# EAGLE board haasoscope_pro_input_board (EAGLE 9.6.2)
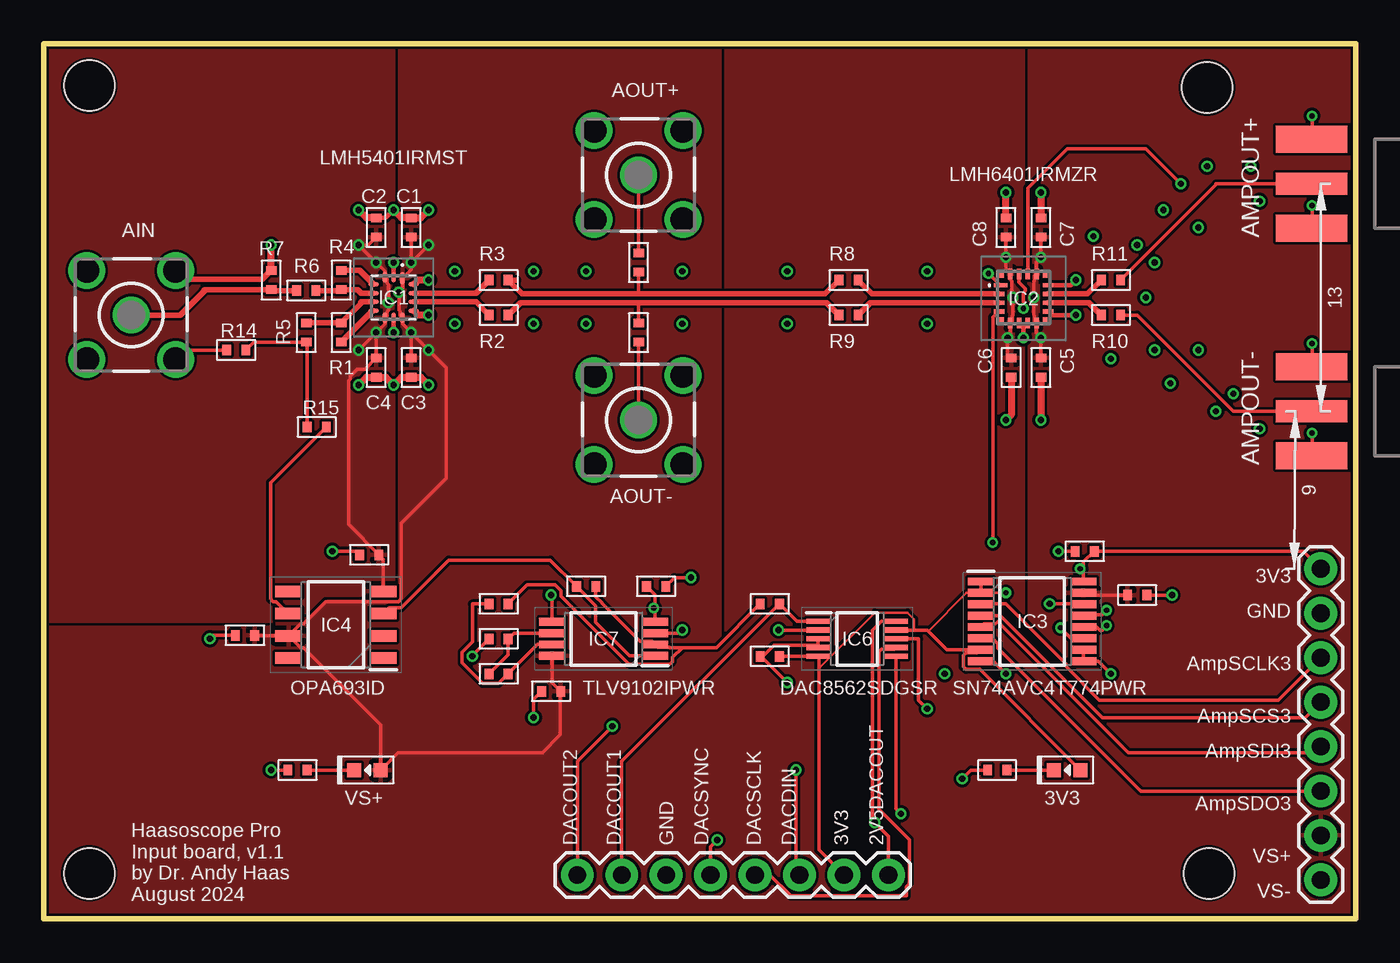
[diagram p0: board, top side]
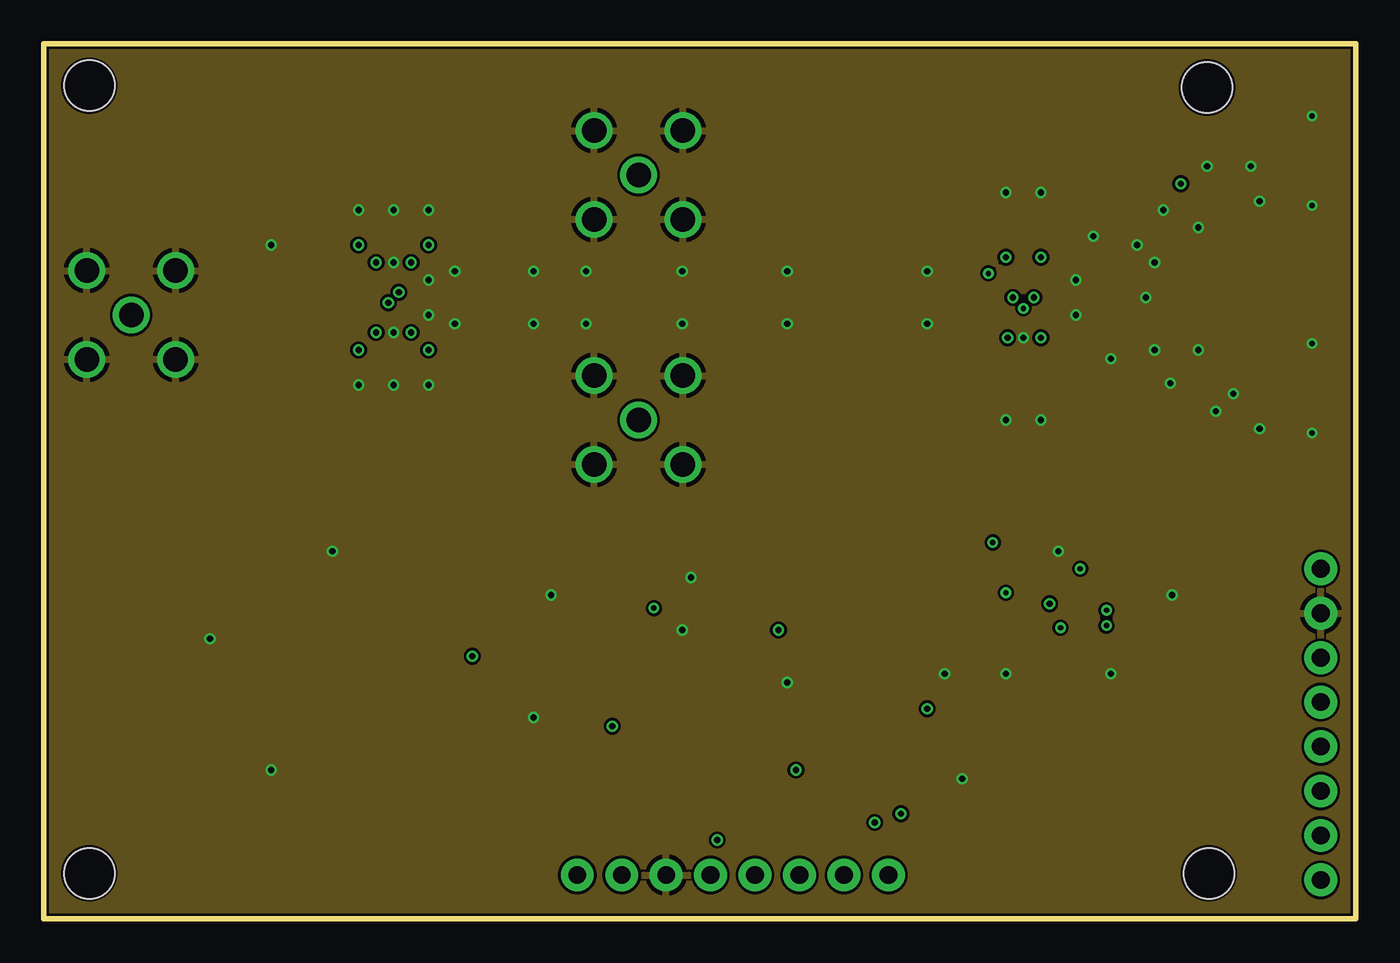
[diagram p1: board, inner layer topgnd]
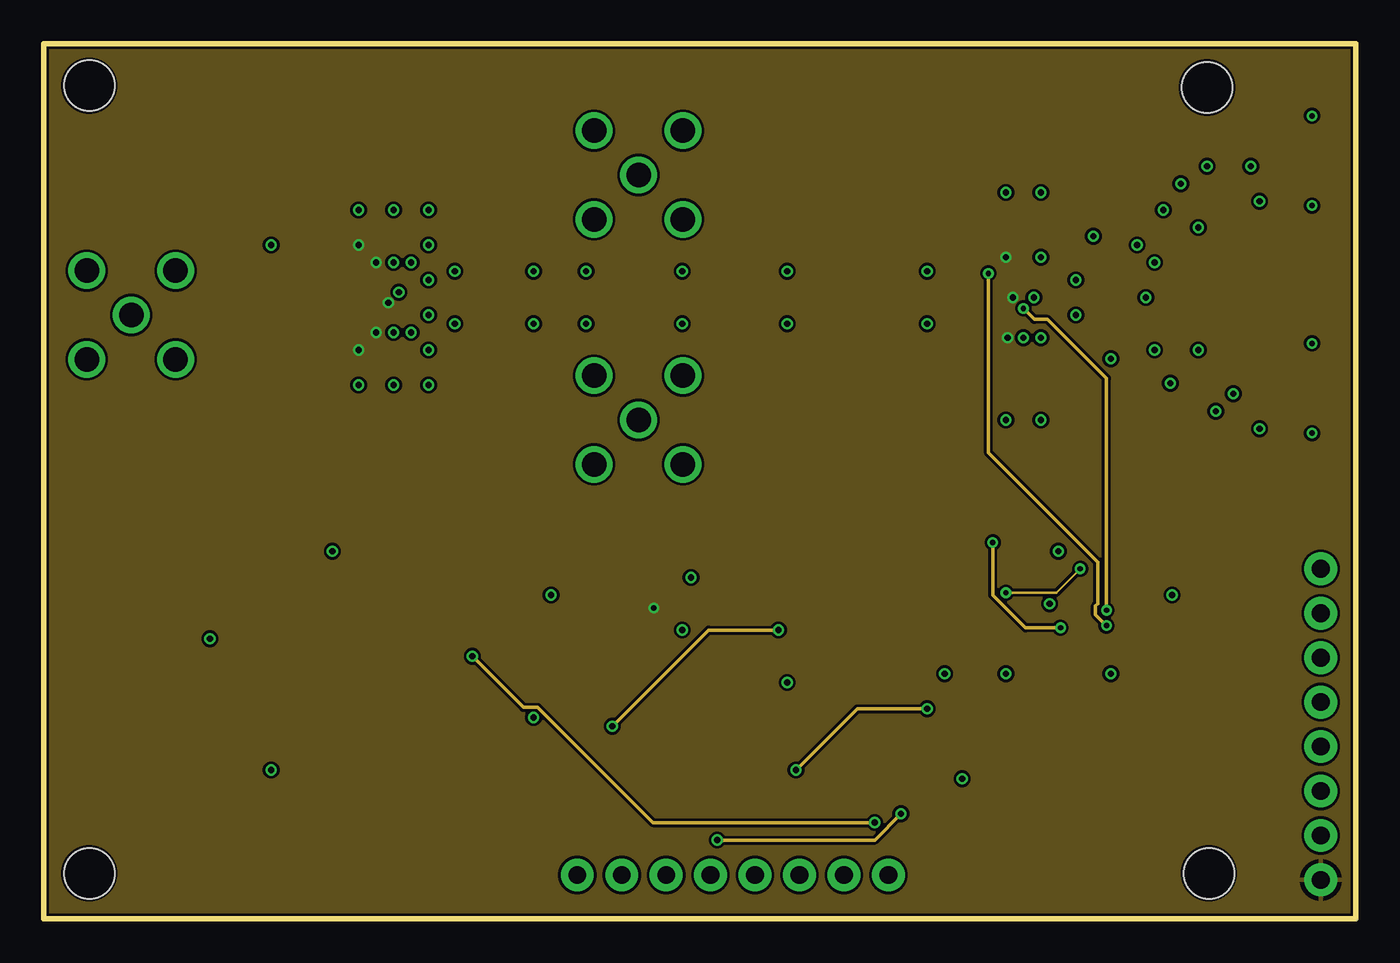
[diagram p2: board, inner layer vsmin]
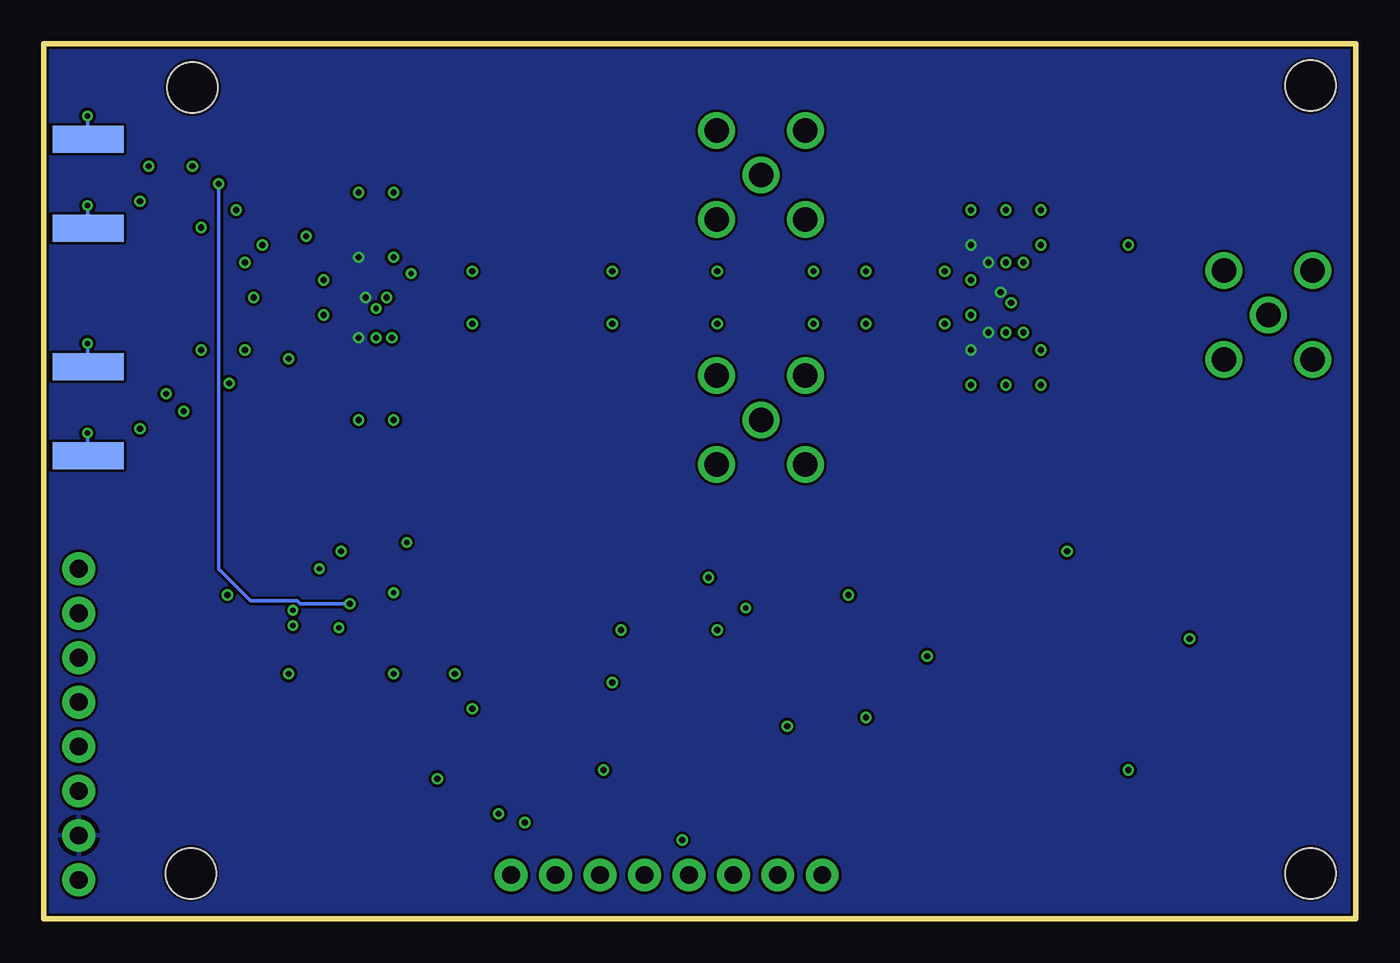
[diagram p3: board, bottom side, seen from below]

Size 75 x 50 mm. Coordinates in mm from the lower left corner, seen from the top.
Outline: 0,50 0,0 75,0 75,50 0,50
Copper layers (1*2*15*16): top 0.035mm / dielectric 0.2mm / topgnd 0.0175mm / dielectric 0.3mm / vsmin 0.0175mm / dielectric 0.2mm / vsplus 0.035mm
Design rules "Seeed_AllPCB_MacroFab_haas6mil *": minimum track width 6mil, minimum drill 12mil, track to track 6mil, track to pad 6mil, pad to pad 6mil, via to via 6mil, smd to smd 0mil, copper to edge 6mil, drill to drill 6mil, minimum pad ring 6mil, minimum via ring 6mil, stop-mask expansion 6mil, vias tented up to drill 25mil, thermal gap 10mil
Net classes: 0 default: width 0.203 mm; 1 power: width 0.152 mm
Holes 2.9 mm at 2.6,47.6 66.5,47.5 2.6,2.6 66.6,2.6

## Footprints (pad centres in the part's own frame; a part is rotated, then mirrored left to right if it is on the bottom)
BU-SMB-V = drill 1.4: 1 0,0; 2 -2.54,2.54; 3 2.54,2.54; 4 2.54,-2.54; 5 -2.54,-2.54
SMA_EDGELAUNCH = smd 4.064 x 1.524: GND@1 2.032,-2.54; GND@2 2.032,2.54 | smd 4.064 x 1.524 bottom: GND@3 2.032,2.54; GND@4 2.032,-2.54 | smd 4.064 x 1.27: P 2.032,0
C0402 = smd 0.5 x 0.6: P$1 -0.55,0; P$2 0.55,0
LED0603 = smd 0.8 x 0.8: ANODE 0.75,0; CATHODE -0.75,0
LMH5401IRMSR = smd 0.7 x 0.25: 1 -1.1,0.5 | smd 0.6 x 0.25: 2 -1.15,0; 3 -1.15,-0.5; 8 1.15,-0.5; 9 1.15,0; 10 1.15,0.5 | smd 0.25 x 0.6: 4 -0.75,-1.15; 5 -0.25,-1.15; 6 0.25,-1.15; 7 0.75,-1.15; 11 0.75,1.15; 12 0.25,1.15; 13 -0.25,1.15; 14 -0.75,1.15
LMH6401IRMZR = smd 0.8 x 0.25: 1 -1.3,0.7 | smd 0.6 x 0.25: 2 -1.4,0.2; 3 -1.4,-0.3; 4 -1.4,-0.8; 9 1.4,-0.8; 10 1.4,-0.3; 11 1.4,0.2; 12 1.4,0.7 | smd 0.25 x 0.6: 5 -0.75,-1.45; 6 -0.25,-1.45; 7 0.25,-1.45; 8 0.75,-1.45; 13 0.75,1.35; 14 0.25,1.35; 15 -0.25,1.35; 16 -0.75,1.35 | smd 0.25 x 0.25: 17 -1.25,1.25; 18 -1.25,-1.25; 19 1.25,-1.25; 20 1.25,1.25
SOP65P640X120-16N = smd 1.475 x 0.45: 1 -2.938,2.275; 2 -2.938,1.625; 3 -2.938,0.975; 4 -2.938,0.325; 5 -2.938,-0.325; 6 -2.938,-0.975; 7 -2.938,-1.625; 8 -2.938,-2.275; 9 2.938,-2.275; 10 2.938,-1.625; 11 2.938,-0.975; 12 2.938,-0.325; 13 2.938,0.325; 14 2.938,0.975; 15 2.938,1.625; 16 2.938,2.275
SOIC127P600X175-8N = smd 1.528 x 0.65: 1 -2.711,1.905; 2 -2.711,0.635; 3 -2.711,-0.635; 4 -2.711,-1.905; 5 2.711,-1.905; 6 2.711,-0.635; 7 2.711,0.635; 8 2.711,1.905
SOP50P490X110-10N = smd 1.4 x 0.3: 1 -2.2,1; 2 -2.2,0.5; 3 -2.2,0; 4 -2.2,-0.5; 5 -2.2,-1; 6 2.2,-1; 7 2.2,-0.5; 8 2.2,0; 9 2.2,0.5; 10 2.2,1
SOP65P640X120-8N = smd 1.475 x 0.45: 1 -2.938,0.975; 2 -2.938,0.325; 3 -2.938,-0.325; 4 -2.938,-0.975; 5 2.938,-0.975; 6 2.938,-0.325; 7 2.938,0.325; 8 2.938,0.975
1X08 = drill 1.016 pad 1.88: 1 0,0; 2 2.54,0; 3 5.08,0; 4 7.62,0; 5 10.16,0; 6 12.7,0; 7 15.24,0; 8 17.78,0
R0402 = smd 0.5 x 0.6: P$1 -0.55,0; P$2 0.55,0

## Placement (x,y rotation side)
AIN  BU-SMB-V  [BU-SMB-V]  5,34.5 0 top
AMPOUT+  out+  [SMA_EDGELAUNCH]  74.5,42 180 top
AMPOUT-  out-  [SMA_EDGELAUNCH]  74.5,29 180 top
AOUT+  BU-SMB-V  [BU-SMB-V]  34,42.5 0 top
AOUT-  BU-SMB-V  [BU-SMB-V]  34,28.5 0 top
C1  0.1uF  [C0402]  21,39.5 90 top
C2  0.1uF  [C0402]  19,39.5 90 top
C3  0.1uF  [C0402]  21,31.5 270 top
C4  0.1uF  [C0402]  19,31.5 270 top
C5  0.1uF  [C0402]  57,31.5 270 top
C6  0.1uF  [C0402]  55.3,31.5 270 top
C7  0.1uF  [C0402]  57,39.5 90 top
C8  0.1uF  [C0402]  55,39.5 90 top
C9  0.1uF  [C0402]  62.5,18.5 0 top
C10  0.1uF  [C0402]  59.5,21 180 top
C11  0.1uF  [C0402]  11.5,16.2 180 top
C12  0.1uF  [C0402]  18.6,20.8 180 top
C13  0.1uF  [C0402]  29,13 180 top
C14  0.1uF  [C0402]  35,19 0 top
C15  0.1uF  [C0402]  41.5,15 180 top
D1  green  [LED0603]  18.5,8.5 0 top
D2  green  [LED0603]  58.5,8.5 0 top
IC1  LMH5401IRMST  [LMH5401IRMSR]  20,35.5 270 top
IC2  LMH6401IRMZR  [LMH6401IRMZR]  56,35.5 0 top
IC3  SN74AVC4T774PWR  [SOP65P640X120-16N]  56.5,17 0 top
IC4  OPA693ID  [SOIC127P600X175-8N]  16.7,16.8 180 top
IC6  DAC8562SDGSR  [SOP50P490X110-10N]  46.5,16 0 top
IC7  TLV9102IPWR  [SOP65P640X120-8N]  32,16 180 top
J1  8pin  [1X08]  30.5,2.5 0 top
J4  8pin  [1X08]  73,20 270 top
R1  127  [R0402]  17,33.5 270 top
R2  39  [R0402]  26,34.5 0 top
R3  39  [R0402]  26,36.5 0 top
R4  127  [R0402]  17,36.5 90 top
R5  66.5  [R0402]  15,33.5 90 top
R6  22.6  [R0402]  15,35.9 0 top
R7  357  [R0402]  13,36.5 270 top
R8  0  [R0402]  46,36.5 0 top
R9  0  [R0402]  46,34.5 0 top
R10  39  [R0402]  61,34.5 0 top
R11  39  [R0402]  61,36.5 0 top
R12  1k  [R0402]  14.5,8.5 0 top
R13  1k  [R0402]  54.5,8.5 0 top
R14  0  [R0402]  11,32.5 0 top
R15  0  [R0402]  15.6,28.1 180 top
R16  1k  [R0402]  41.5,18 0 top
R17  2k  [R0402]  26,16 0 top
R18  1k  [R0402]  26,14 0 top
R19  1k  [R0402]  31,19 0 top
R20  1k  [R0402]  26,18 180 top
R21  0  [R0402]  34,37.5 90 top
R22  0  [R0402]  34,33.5 270 top

## Library data of the parts
AIN AOUT+ AOUT- = con-coax; OC_FARNELL: unknown; OC_NEWARK: unknown
AMPOUT+ AMPOUT- = adafruit
C1-C15 R1-R22 = MF_Passives; POPULATE: 1
D1 D2 = MF_LEDs; HOUSEPART: NO; POPULATE: 1
IC1 = LMH5401IRMST; DESCRIPTION: Texas Instruments LMH5401IRMST, RF Amplifier Differential, 14-Pin UQFN; HEIGHT: 0.6mm; MANUFACTURER_NAME: Texas Instruments; MANUFACTURER_PART_NUMBER: LMH5401IRMST; MOUSER_PART_NUMBER: 595-LMH5401IRMST; MOUSER_PRICE-STOCK: https://www.mouser.co.uk/ProductDetail/Texas-Instruments/LMH5401IRMST?qs=pV2tVPdcZ6z49pjv7lt75w%3D%3D
IC2 = LMH6401IRMZR; DESCRIPTION: Differential Amplifiers 4.5 GHz Ultra Wideband Digital Variable Gain Amplifier 16-UQFN-HR -40 to 85; HEIGHT: 0.65mm; MANUFACTURER_NAME: Texas Instruments; MANUFACTURER_PART_NUMBER: LMH6401IRMZR; MOUSER_PART_NUMBER: 595-LMH6401IRMZR; MOUSER_PRICE-STOCK: https://www.mouser.co.uk/ProductDetail/Texas-Instruments/LMH6401IRMZR?qs=zEQ6BYqA5vFvz%252BaadXvvtQ%3D%3D
IC3 = SN74AVC4T774PWR; DESCRIPTION: 4-Bit Dual-Supply Bus Transceiver With Configurable Voltage-Level Shifting and 3-State Outputs; HEIGHT: 1.2mm; MANUFACTURER_NAME: Texas Instruments; MANUFACTURER_PART_NUMBER: SN74AVC4T774PWR; MOUSER_PART_NUMBER: 595-SN74AVC4T774PWR; MOUSER_PRICE-STOCK: https://www.mouser.co.uk/ProductDetail/Texas-Instruments/SN74AVC4T774PWR?qs=WxL8HmPi5r562Eu%2F2kE2LA%3D%3D
IC4 = OPA693ID; DESCRIPTION: Ultra-Wideband, Fixed Gain Video Buffer Amplifier with Disable; HEIGHT: 1.75mm; MANUFACTURER_NAME: Texas Instruments; MANUFACTURER_PART_NUMBER: OPA693ID; MOUSER_PART_NUMBER: 595-OPA693ID; MOUSER_PRICE-STOCK: https://www.mouser.co.uk/ProductDetail/Texas-Instruments/OPA693ID?qs=wgAEGBTxy7n5Zagrtgs30Q%3D%3D
IC6 = DAC8562SDGSR; DESCRIPTION: 16-bit, dual-channel, low-power, ultra-low glitch, voltage output DAC with 2.5V, 4ppm/C reference; HEIGHT: 1.1mm; MANUFACTURER_NAME: Texas Instruments; MANUFACTURER_PART_NUMBER: DAC8562SDGSR; MOUSER_PART_NUMBER: 595-DAC8562SDGSR; MOUSER_PRICE-STOCK: https://www.mouser.co.uk/ProductDetail/Texas-Instruments/DAC8562SDGSR?qs=L4ss%2FyqpMWQjhHzbOFnTNg%3D%3D
IC7 = TLV9102IPWR; DESCRIPTION: Dual 1MHz, 16-V rail-to-rail input/output, low-offset voltage, low-power op amp; HEIGHT: 1.2mm; MANUFACTURER_NAME: Texas Instruments; MANUFACTURER_PART_NUMBER: TLV9102IPWR; MOUSER_PART_NUMBER: 595-TLV9102IPWR; MOUSER_PRICE-STOCK: https://www.mouser.co.uk/ProductDetail/Texas-Instruments/TLV9102IPWR?qs=9r4v7xj2LnnLM2E8pIcWlQ%3D%3D
J1 J4 = SparkFun-Connectors; PROD_ID: CONN-08438

## Nets
1V25OUT-: IC7.7 R18.P$2 R20.P$2
2V5DACOUT: IC6.10 J1.8 R17.P$1
3V3 [power]: C10.P$1 C15.P$1 D2.ANODE IC3.1 IC3.2 IC3.7 IC3.16 IC6.5 IC6.9 J1.7 J4.1
AIN: AIN.1 R6.P$1 R7.P$2
AIN_N: IC1.5 R4.P$1 R6.P$2
AIN_P: IC1.6 R1.P$1 R5.P$2
AMPIN_N: IC2.3 R9.P$2
AMPIN_P: IC2.2 R8.P$2
AMPOUT_N: IC2.10 R10.P$1
AMPOUT_P: IC2.11 R11.P$1
AMPOUTSMA_N: AMPOUT-.P R10.P$2
AMPOUTSMA_P: AMPOUT+.P R11.P$2
AMPSCLK: IC2.14 IC3.14
AMPSCS: IC2.15 IC3.13
AMPSDI: IC2.1 IC3.12
AMPSDO: IC2.4 IC3.11
AOFFSET: R5.P$1 R14.P$2 R15.P$2
AOUT_N: IC1.12 R2.P$1
AOUT_P: IC1.13 R3.P$1
AOUTSMA_N: R2.P$2 R9.P$1 R22.P$1
AOUTSMA_P: R3.P$2 R8.P$1 R21.P$1
DACAMPOUT1: IC4.3 IC7.1 R19.P$1
DACDIN: IC6.8 J1.6
DACOUT1: IC6.1 J1.2 R16.P$2
DACOUT2: IC6.2 J1.1
DACSCLK: IC6.7 J1.5
DACSYNC [power]: IC6.6 J1.4
GND: AIN.2 AIN.3 AIN.4 AIN.5 AMPOUT+.GND@1 AMPOUT+.GND@2 AMPOUT+.GND@3 AMPOUT+.GND@4 AMPOUT-.GND@1 AMPOUT-.GND@2 AMPOUT-.GND@3 AMPOUT-.GND@4 AOUT+.2 AOUT+.3 AOUT+.4 AOUT+.5 AOUT-.2 AOUT-.3 AOUT-.4 AOUT-.5 C1.P$2 C2.P$2 C3.P$2 C4.P$2 C5.P$2 C6.P$2 C7.P$2 C8.P$2 C9.P$2 C10.P$2 C11.P$2 C12.P$2 C13.P$2 C14.P$2 C15.P$2 IC1.2 IC1.9 IC1.11 IC1.14 IC2.6 IC2.7 IC2.9 IC2.12 IC3.8 IC3.9 IC3.10 IC6.3 IC6.4 IC7.3 IC7.5 J1.3 J4.2 R7.P$1 R12.P$1 R13.P$1 R14.P$1
N$1: D1.CATHODE R12.P$2
N$2: D2.CATHODE R13.P$2
N$3: IC7.2 R16.P$1 R19.P$2 R20.P$1
N$4: AOUT-.1 R22.P$2
N$5: IC7.6 R17.P$2 R18.P$1
N$6: AOUT+.1 R21.P$2
N$10: IC1.7 R1.P$2
N$13: IC1.4 R4.P$2
OFFSETOUT: IC4.6 R15.P$1
SCLK3: IC3.3 J4.3
SCS3: IC3.4 J4.4
SDI3: IC3.5 J4.5
SDO3: IC3.6 J4.6
VS+: C1.P$1 C3.P$1 C5.P$1 C7.P$1 C9.P$1 C11.P$1 C13.P$1 D1.ANODE IC1.1 IC1.10 IC2.8 IC2.13 IC3.15 IC4.7 IC7.8 J4.7
VS-: C2.P$1 C4.P$1 C6.P$1 C8.P$1 C12.P$1 C14.P$1 IC1.3 IC1.8 IC2.5 IC2.16 IC4.4 IC7.4 J4.8

## Tracks (layer width: path | path; a pad name or v marks a point on that pad's centre or on a via)
1V25OUT-
  top 0.203: IC7.7 28.23,15.68 R18.P$2 26,13.45 25.09,13.45 23.92,14.62 23.92,15.24 24.5,15.82 24.5,18 R20.P$2
2V5DACOUT  (via drill 0.35)
  top 0.203: R17.P$1 24.5,15.05 v24.5,15 | J1.8 48.28,4.72 v47.5,5.5 47.38,5.62 47.38,16.5 47.88,17 IC6.10
  vsmin 0.203: v24.5,15 27.42,12.08 28.24,12.08 34.82,5.5 v47.5,5.5
3V3  (via drill 0.3)
  top 0.152: 50.56,16.44 52.75,18.62 IC3.2 v55,18.62 | 49.75,16.5 49.75,17.12 49.38,17.5 47.5,17.5 44.38,14.38 44.3,14.38 | 59.44,20 v59.25,20
  top 0.203: IC3.16 59.44,20 59.44,20.39 C10.P$1 72,21 J4.1 | IC3.7 53.5,15.38 | 53.5,15.38 51.62,15.38 50.56,16.44 50.5,16.5 49.75,16.5 IC6.9 | J1.7 44.3,3.94 44.3,14.38 IC6.5 C15.P$1 | D2.ANODE 53.5,14.25 52.72,14.25 52.57,14.39 52.57,15.05 52.72,15.2 53.33,15.2 53.5,15.38 | IC3.2 IC3.1
  vsmin 0.152: v55,18.62 57.88,18.62 v59.25,20
AIN
  top 0.305: AIN.1 7.8,34.5 9.2,35.9 9.15,35.9 9.2,35.95 R7.P$2 13.05,35.9 R6.P$1
AIN_N
  top 0.305: R6.P$2 16.95,35.9 R4.P$1 17.95,35.95 18.15,35.75 IC1.5
AIN_P
  top 0.305: IC1.6 18.15,35.25 18.1,35.2 18.1,35.15 R1.P$1 R5.P$2
AMPIN_N
  top 0.305: IC2.3 47.25,35.2 R9.P$2
AMPIN_P
  top 0.305: R8.P$2 47.35,35.7 IC2.2
AMPOUT_N
  top 0.305: IC2.10 59.75,35.2 R10.P$1
AMPOUT_P
  top 0.305: IC2.11 59.65,35.7 R11.P$1
AMPOUTSMA_N
  top 0.203: R10.P$2 62.5,34.5 68,29 AMPOUT-.P 73,29
AMPOUTSMA_P
  top 0.203: R11.P$2 67,41.95 67,42 AMPOUT+.P
AMPSCLK  (via drill 0.35)
  top 0.203: IC2.14 56.25,41.75 58.5,44 63,44 v65,42 | v57.5,18 59.41,18 IC3.14
  vsplus 0.203: v65,42 65,20 63.18,18.18 60.52,18.18 60.33,18 v57.5,18
AMPSCS  (via drill 0.3)
  top 0.203: IC2.15 55.75,36.38 56.12,36 56.12,35.88 56,35.75 v56,34.88 | v60.75,17.62 60.5,17.38 59.5,17.38 IC3.13
  vsmin 0.203: v56,34.88 56.62,34.25 57.38,34.25 60.75,30.88 v60.75,17.62
AMPSDI  (via drill 0.3)
  top 0.203: v54,36.88 54.62,36.25 IC2.1 | v60.75,16.75 60.5,16.5 60.38,16.5 60.12,16.75 59.5,16.75 IC3.12
  vsmin 0.203: v54,36.88 54,26.62 60.25,20.38 60.25,18 60.12,17.88 60.12,17.38 v60.75,16.75
AMPSDO  (via drill 0.3)
  top 0.203: v54.25,21.5 54.25,34.38 54.5,34.62 IC2.4 | v58.12,16.62 58.75,16 59.38,16 IC3.11
  vsmin 0.203: v54.25,21.5 54.25,18.5 56.12,16.62 v58.12,16.62
AOFFSET
  top 0.203: R14.P$2 12,32.95 R5.P$1 15.05,32.9 R15.P$2
AOUT_N
  top 0.305: IC1.12 24.7,35.25 R2.P$1
AOUT_P
  top 0.305: IC1.13 24.7,35.75 R3.P$1
AOUTSMA_N
  top 0.203: R22.P$1 34,35.2
  top 0.305: R2.P$2 27.25,35.2 34,35.2 44.75,35.2 R9.P$1
AOUTSMA_P
  top 0.203: R21.P$1 34,35.7
  top 0.305: 27,36.5 R3.P$2 27.35,35.7 34,35.7 44.65,35.7 R8.P$1
DACAMPOUT1
  top 0.203: IC7.1 33.48,15.03 31.55,16.95 31.55,17.9 R19.P$1 28.95,20.5 23.16,20.5 20.43,17.77 19.75,17.77 IC4.3
DACDIN  (via drill 0.35)
  top 0.203: J1.6 43,2.7 v43,8.5 | v50.5,12 50,12.5 50,16 IC6.8
  vsmin 0.203: v43,8.5 46.5,12 v50.5,12
DACOUT1
  top 0.203: IC6.1 43.05,17 R16.P$2 33.04,8.99 J1.2
DACOUT2  (via drill 0.35)
  top 0.203: J1.1 30.5,9 v32.5,11 | v42,16.5 IC6.2
  vsmin 0.203: v32.5,11 38,16.5 v42,16.5
DACSCLK
  top 0.203: IC6.7 48.6,15.4 47.9,15.4 47.75,15.26 47.75,6.25 49.47,4.53 49.47,2.01 49.31,1.84 49.31,1.31 42.71,1.31 41.51,2.5 J1.5
DACSYNC  (via drill 0.35)
  top 0.203: J1.4 38.12,4.12 v38.5,4.5 | v49,6 48.7,6.3 IC6.6
  vsmin 0.203: v38.5,4.5 47.5,4.5 v49,6
GND  (via drill 0.3, 0.35)
  top 0.203: AIN.4 8.08,32.5 R14.P$1 | C14.P$2 36.05,19.5 v37,19.5 | v29,18.5 29.06,18.44 IC7.5 | v28,11.5 28,12.55 C13.P$2 | IC7.3 36.33,16.32 v36.5,16.5 | C12.P$2 17.85,21 v16.5,21 | R12.P$1 v13,8.5 | C11.P$2 9.7,16.2 v9.5,16 | v52.5,8 53,8.5 R13.P$1 | IC3.8 54.28,14.72 v55,14 | v61,14 60.28,14.72 IC3.9 IC3.10 | C9.P$2 v64.5,18.5 | 44.25,15.62 44.25,16 IC6.3 | 44.25,15.62 44.25,15.5 IC6.4 44.25,15.62 | v42.5,13.5 41,15 C15.P$2 41.12,15 41.75,15.62 44.25,15.62 | v58,21 C10.P$2 | v72.5,27.75 72.5,26.5 AMPOUT-.GND@2 | v72.5,32.88 72.5,31.62 AMPOUT-.GND@4 | v72.5,40.75 72.5,39.5 AMPOUT+.GND@2 | v72.5,45.88 72.5,44.62 AMPOUT+.GND@4
  top 0.254: IC1.9 v20,33.5 | IC1.2 v20,37.5 | v20,40.5 19.55,40.05 C2.P$2 | 21.4,36.5 IC1.14 | 21.4,34.5 IC1.11 | v59,36.5 58.7,36.2 IC2.12 | v59,34.5 57.64,34.5 57.49,34.65 57.45,34.65 IC2.9 | IC2.6 56,33.8 | 56,33.8 v56,33.2 | IC2.7 56,33.8
  top 0.305: R7.P$1 12.49,36.54 8.04,36.54 AIN.3
  top 0.406: v18,30.5 18.45,30.95 C4.P$2 19.55,30.95 v20,30.5 20.45,30.95 C3.P$2 21.55,30.95 v22,30.5 | C2.P$2 18.45,40.05 v18,40.5 | v20,40.5 20.45,40.05 C1.P$2 21.55,40.05 v22,40.5 | v22,36.5 21.4,36.5 IC1.14 | v22,34.5 21.4,34.5 IC1.11 | R7.P$1 v13,38.5 | C6.P$2 55.3,28.8 v55,28.5 | C5.P$2 v57,28.5 | C8.P$2 v55,41.5 | v57,41.5 C7.P$2
  vsplus 0.203: v72.5,27.75 72.5,26.5 AMPOUT-.GND@2 | v72.5,32.88 72.5,31.62 AMPOUT-.GND@4 | v72.5,40.75 72.5,39.5 AMPOUT+.GND@2 | v72.5,45.88 72.5,44.62 AMPOUT+.GND@4
  other vias: 51.5,14 67,29 68,30 66,32.5 63.5,32.5 63,35.5 69.5,28 69.5,41 69,43 66.5,43 66,39.5 64,40.5 63.5,37.5 62.5,38.5 60,39 61,32 50.5,37 50.5,34 42.5,37 42.5,34 36.5,34 36.5,37 31,37 31,34 28,34 28,37 23.5,37 23.5,34 64.4,30.6
  pour topgnd: 78,54.5 78,-3 -4,-3 -4,54.5
N$1
  top 0.203: R12.P$2 D1.CATHODE
N$2
  top 0.203: R13.P$2 D2.CATHODE
N$3
  top 0.203: R16.P$1 38.45,15.5 36.5,15.5 | 36.5,15.5 35.78,15.5 35.11,15.5 IC7.2 34.77,15.85 34.09,15.85 31.91,18.04 31.91,18.05 31.55,18.4 R19.P$2 | R20.P$1 27.62,19.07 | 27.63,19.08 27.62,19.07 | 36.5,15.5 35.93,14.93 35.93,14.7 35.78,14.55 33.45,14.55 29.58,18.42 29.58,18.74 29.24,19.08 28.76,19.08 28.75,19.07 27.62,19.07
N$4
  top 0.203: R22.P$2 AOUT-.1
N$5
  top 0.203: IC7.6 26.88,16.32 R17.P$2 26.55,15.1 R18.P$1
N$6
  top 0.203: AOUT+.1 R21.P$2
N$10
  top 0.305: R1.P$2 18.8,34.75 IC1.7
N$13
  top 0.305: R4.P$2 18.05,37.05 IC1.4
OFFSETOUT
  top 0.203: IC4.6 13.3,18.13 13.12,18.13 12.97,18.27 12.97,24.92 R15.P$1
SCLK3
  top 0.203: J4.3 70.58,12.5 60.34,12.5 58.45,14.39 58.45,14.55 55,18 53.59,18 IC3.3
SCS3
  top 0.203: IC3.4 54.38,17.32 54.38,17.33 54.68,17.33 60.5,11.5 72.12,11.5 J4.4
SDI3
  top 0.203: J4.5 72.66,9.5 62,9.5 54.53,16.97 54.41,16.85 53.73,16.85 IC3.5
SDO3
  top 0.203: IC3.6 54.23,16.02 54.55,15.71 54.55,15.45 62.7,7.3 J4.6
VS+  (via drill 0.35)
  top 0.203: v21,37.5 21,37.1 IC1.1 20.5,36 v20.3,35.8 20.3,34.76 20.38,34.68 20.38,34.47 IC1.10 20.5,34 v21,33.5 | v21,33.5 v22,32.5 23,31.5 23,25.18 20.43,22.61 20.43,18.27 20.28,18.13 16.13,18.13 14.86,16.86 14.68,16.86 IC4.7 | v21,33.5 C3.P$1 | v21,37.5 C1.P$1 | v21,37.5 v22,38.5 | C5.P$1 v57,33.2 56.75,33.45 IC2.8 56.63,34.17 56.63,34.45 56.6,34.48 v56.6,35.5 56.6,36.42 56.63,36.45 56.63,36.73 IC2.13 56.75,37.55 v57,37.8 C7.P$1 | C9.P$1 59.56,18.5 IC3.15 | C13.P$1 29.52,13.03 | 29.52,13.03 29.06,13.49 IC7.8 | 29.52,13.03 29.52,10.53 28.5,9.5 20.25,9.5 D1.ANODE 19.25,11.08 14.86,15.47 14.68,15.47 IC4.7 | IC4.7 12.09,16.16 C11.P$1
  pour vsplus: -1,51 76,51 76,-2 -1,-2
  pour top (rank 2): -5.5,-3.5 -5.5,51.5 76,51.5 76,-3.5
VS-  (via drill 0.3, 0.35)
  top 0.203: C2.P$1 18.55,38.5 v18,38.5 v19,37.5 19.5,37 IC1.3 19.62,36.53 19.62,36.32 19.7,36.24 v19.7,35.2 19.7,34.76 19.62,34.68 19.62,34.47 IC1.8 19.5,34 v19,33.5 | v19,33.5 v18,32.5 | v19,33.5 C4.P$1 18.36,31.41 17.91,31.41 17.5,31 17.5,30.82 17.42,30.74 17.42,22.53 C12.P$1 19.41,20.54 IC4.4 | C8.P$1 v55,37.8 55,37.11 55.13,36.98 55.13,36.97 IC2.16 55.25,36.53 55.35,36.43 55.35,35.55 v55.4,35.5 55.4,34.48 55.37,34.45 55.37,34.17 IC2.5 55.25,33.35 v55.1,33.2 55.1,32.25 C6.P$1 | C14.P$1 34.94,18.51 34.94,17.75 | 34.94,17.75 IC7.4 | v34.88,17.75 34.94,17.75
  pour vsmin: -3,53.5 77,53.5 77,-1 -3,-1
  pour top: 20,17 20,52.5 -2,52.5 -2,17
  pour top: 56,-2 56,52 39,52 39,-2

## Text on the board
tPlace: 3V3 | GND | AmpSCLK3 | AmpSCS3 | AmpSDI3 | AmpSDO3 | VS+ | 3V3 | DACOUT2 | DACOUT1 | GND | DACSYNC | DACSCLK | DACDIN | 3V3 | 2V5DACOUT | VS+ | VS- | Haasoscope Pro / Input board, v1.1 / by Dr. Andy Haas / August 2024